# Altium PCB PCB_relay.PcbDoc
Units mil, origin at the board's own origin, x right, y up, seen from the top; angles counter-clockwise.
Board outline 2710 x 1665 mil, 2 copper layers (Top Layer, Bottom Layer); 18 components, 21 nets, 53 pads, 0 vias.
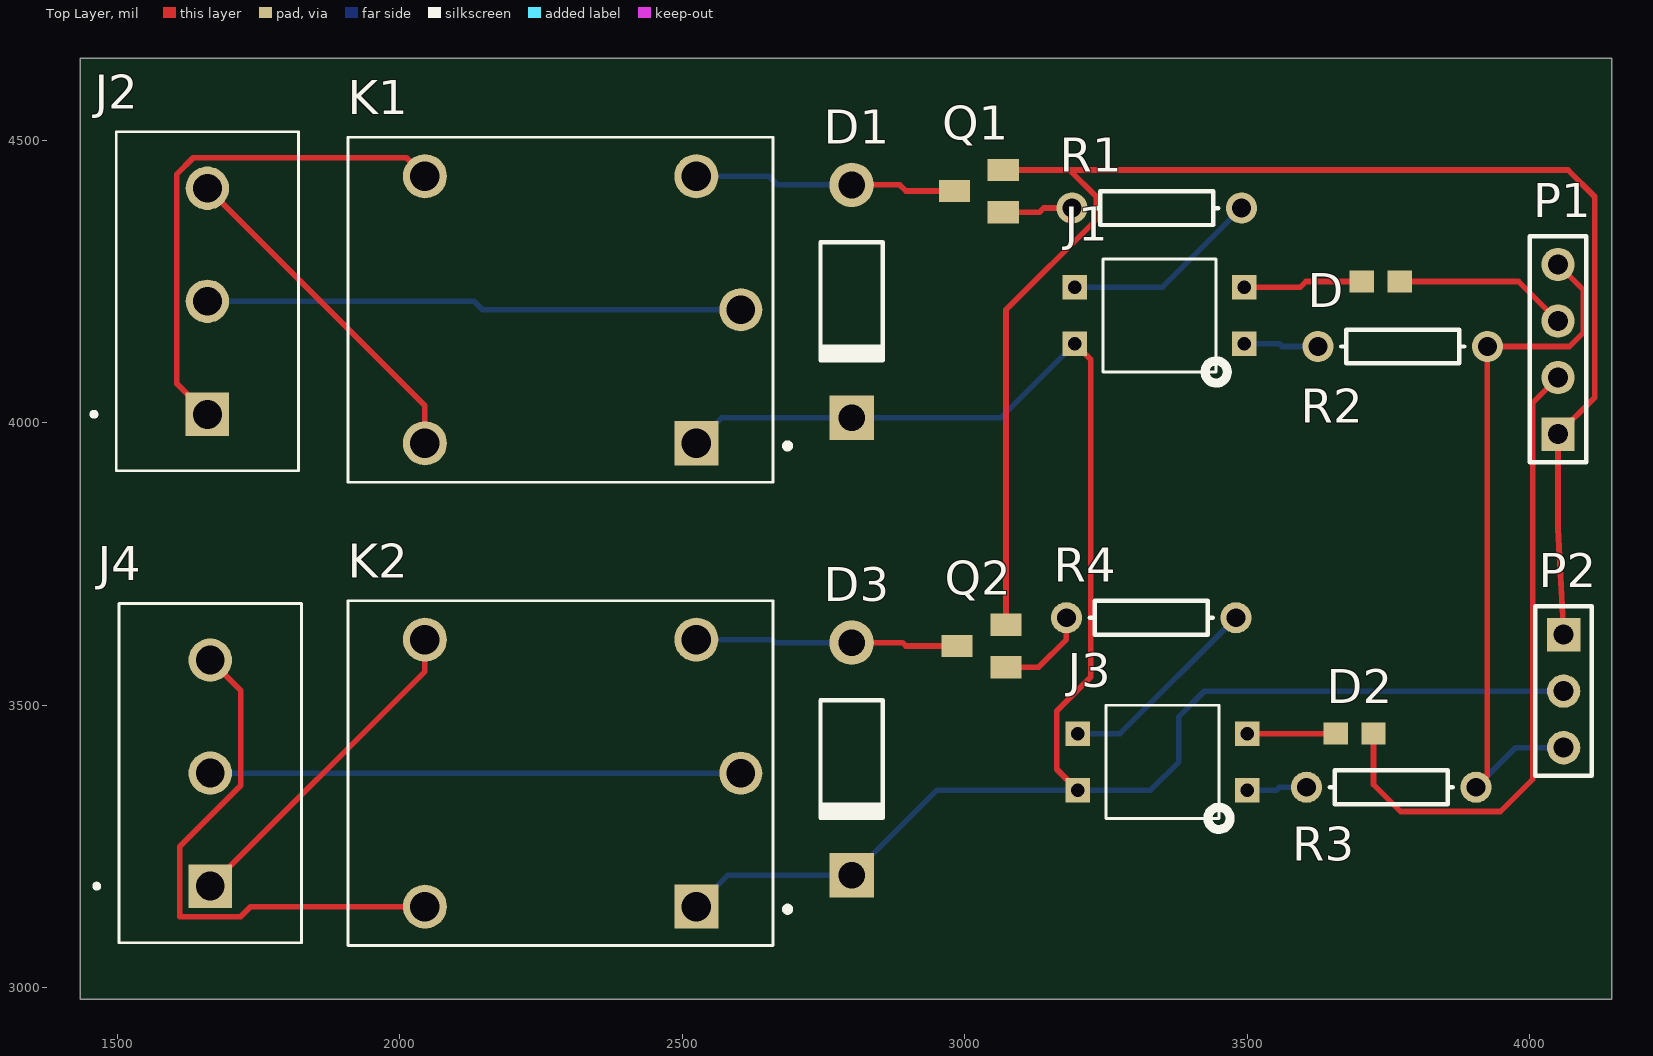
[diagram p0: Top Layer view]
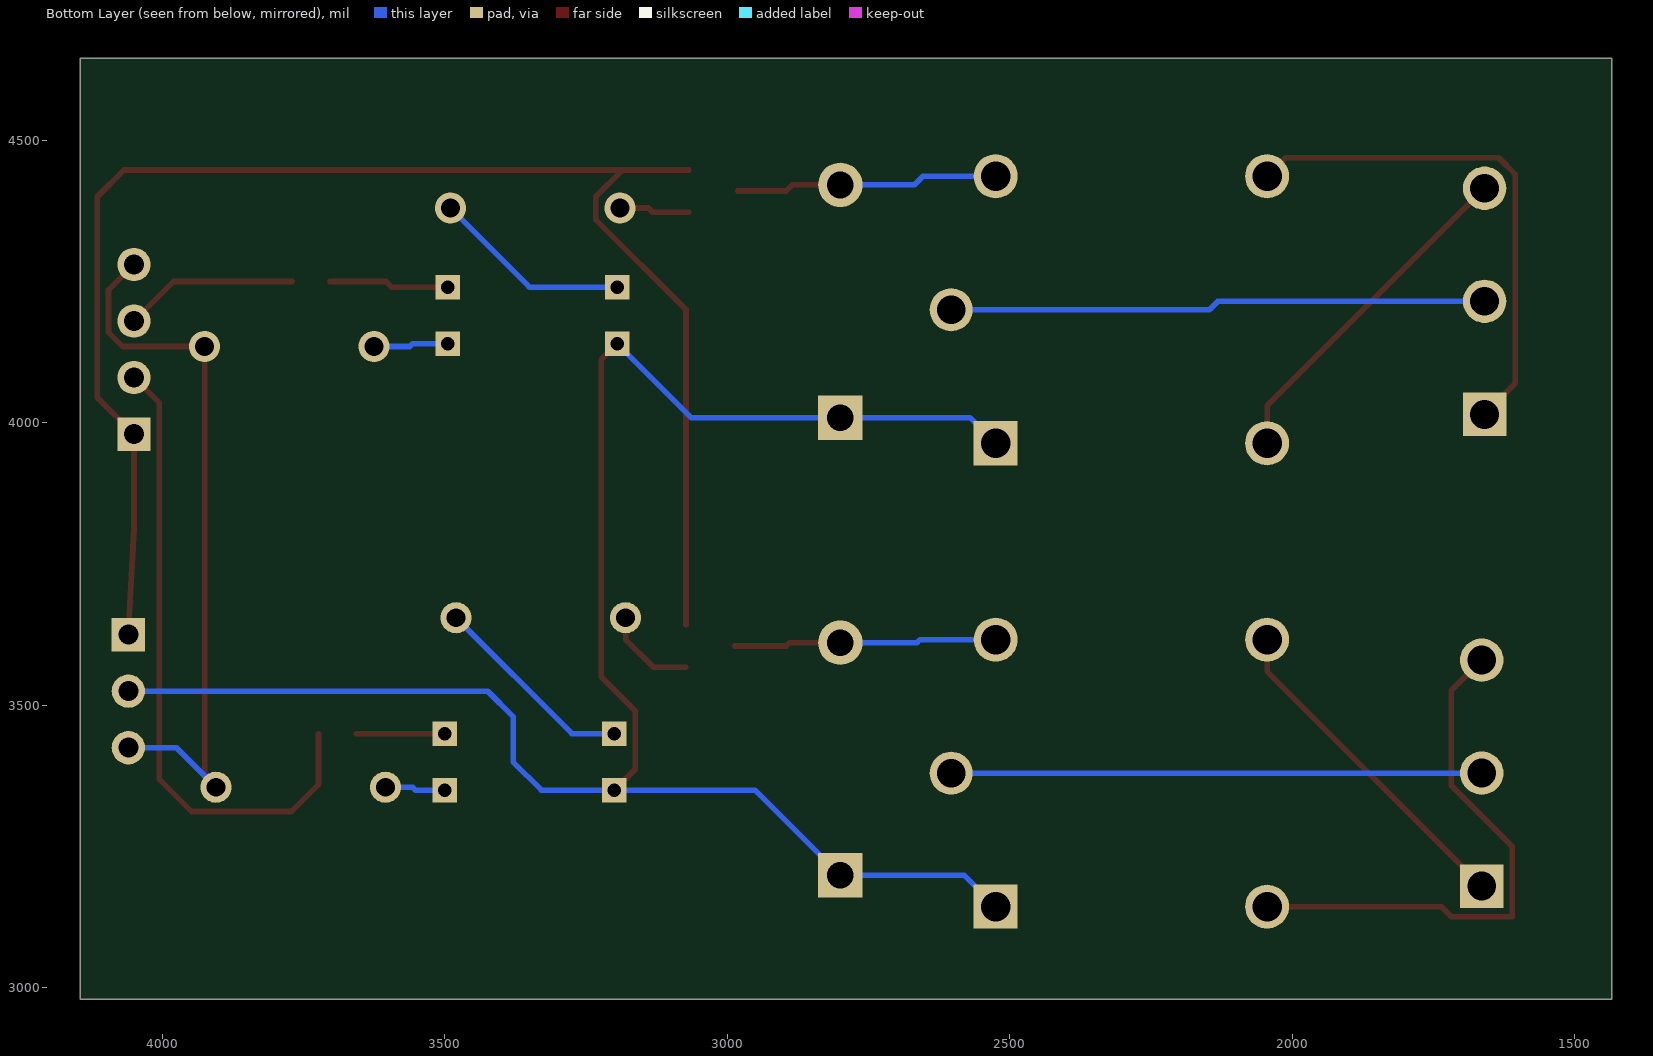
[diagram p1: Bottom Layer view, seen from below]
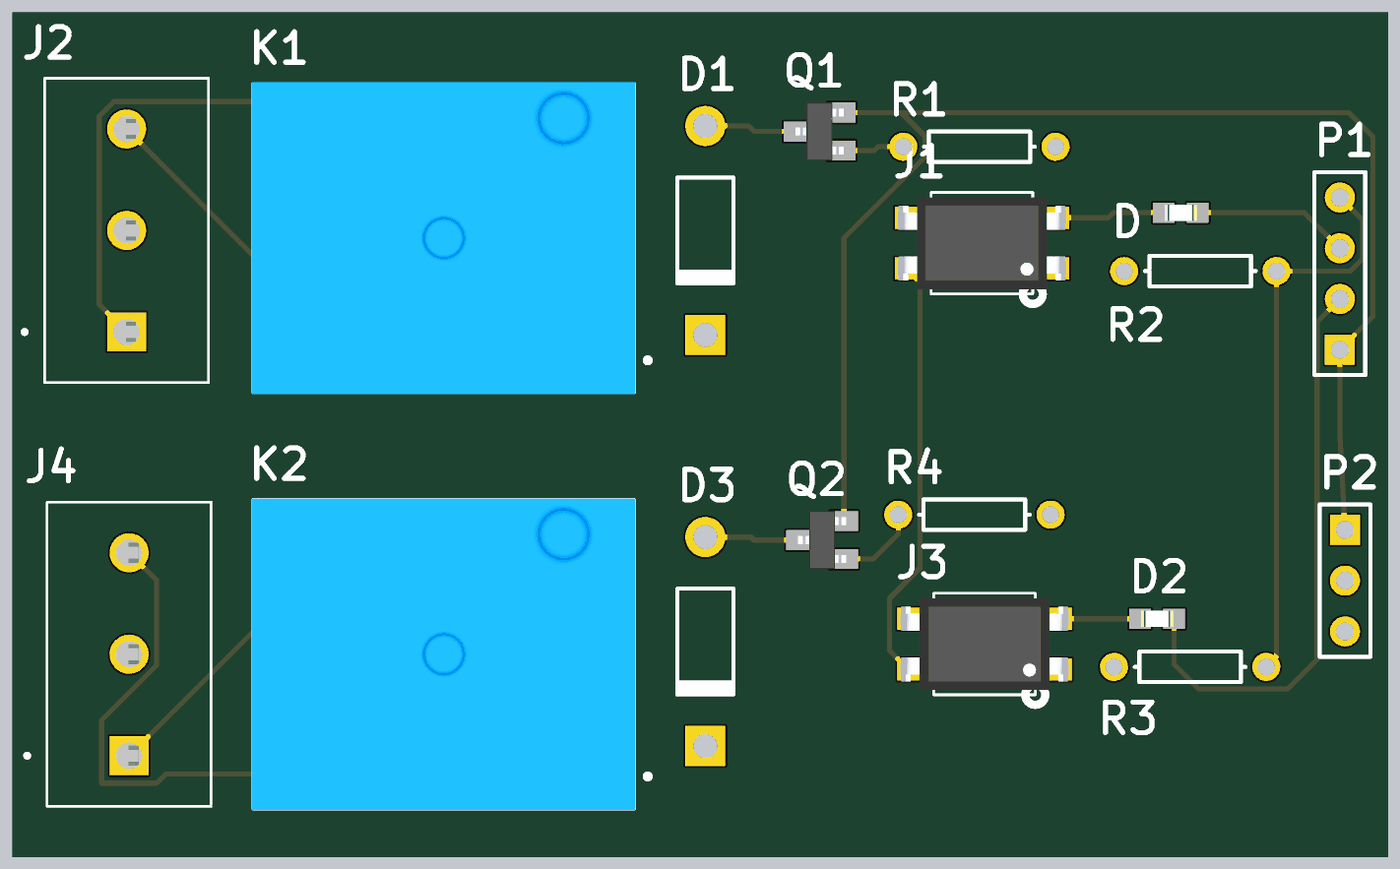
[diagram p2: 3D render of the assembled board from above, using the file's embedded part models]

## Layer stack, top to bottom
Top Solder: solder mask 0.4, Solder Resist, Dk 3.5
Top Layer: signal copper 1.4
Dielectric 1: dielectric 12.6, FR-4, Dk 4.8
Bottom Layer: signal copper 1.4
Bottom Solder: solder mask 0.4, Solder Resist, Dk 3.5

## Board outline
1435,2980 4145,2980 4145,4645 1435,4645

## Design rules (kind name [scope] priority, off if disabled: settings)
Clearance [All] p1: gap=10 ignorepadtopadclearanceinfootprint=FALSE
PolygonConnect [All] p1: connectstyle=Relief reliefconductorwidth=10 reliefentries=4 polygonreliefangle="90 Angle" airgapwidth=10
RoutingVias [All] p1: holewidth=28 width=50 viastyle="Through Hole" minholewidth=28 minwidth=50 maxholewidth=28 maxwidth=50
SolderMaskExpansion [All] p1: expansion=4 istentingtop=FALSE
SupplyNets "Schematic Supply Nets" [InNet('GND')] p1: voltage=0.000
Width [All] p1: maxlimit=10 minlimit=10 preferedwidth=10
30 further rules are at their usual default settings.

## Components (designator, comment, footprint, x,y, rotation, side; value= is the part's Value field where it differs from the comment)
D "LTST-C193TBKT-5A" 0603 3736.54,4250 r180 top
D1 "Diode 1N4004" DO-41 2800,4215 r270 top
D2 "LTST-C193TBKT-5A" 0603 3690,3450 r180 top
D3 "Diode 1N4004" DO-41 2800,3405 r270 top
J1 "LTV-817" LTV-817 3345,4190 r180 top
J2 "TB006_-508-03BE" "CUI_TB006 -508-03BE" 1660,4015 r90 top
J3 "LTV-817" LTV-817 3350,3400 r180 top
J4 "TB006_-508-03BE" "CUI_TB006 -508-03BE" 1665,3180 r90 top
K1 "SRD-05VDC-SL-C" RELAY_SRD-05VDC-SL-C 2285,4200 r180 top
K2 "SRD-05VDC-SL-C" RELAY_SRD-05VDC-SL-C 2285,3380 r180 top
P1 "Header 4" HDR1X4 4050,3980 r90 top
P2 "Header 3" HDR1X3 4060,3625 r270 top
Q1 "BCW31*" SOT23-BEC 3025,4410 r90 top
Q2 "BCW31*" SOT23-BEC 3030,3605 r90 top
R1 "Res1" AXIAL-0.3 3340,4380 r180 top value=1K
R2 "Res1" AXIAL-0.3 3775,4135 r0 top value=1K
R3 "Res1" AXIAL-0.3 3755,3355 r0 top value=1K
R4 "Res1" AXIAL-0.3 3330,3655 r180 top value=1K

## Footprints (in the part's own frame and the unit in brackets; to place one, negate y for a bottom-side part, rotate by r counter-clockwise, add the part's x,y. Pads: shape width x height; smd on the part's side, far side on the other; paste and mask are expansions set on the pad)
0603 [mm]
  rect 1.1x1 smd: 1(-0.85,0) 2(0.85,0)
  body extent -0.8,-0.4 0.8,0.4, height 0.35
AXIAL-0.3 [mm] "Axial Device, Thru-Hole; 2 Leads; 0.3 in Pin Spacing"
  round 1.4 hole 0.85: 1(-3.81,0) 2(3.81,0)
  silkscreen extent -2.77,-0.76 2.77,0.76
"CUI_TB006 -508-03BE" [mm]
  rect 1.95x1.95 / inner round 1.95 / far side rect 1.95x1.95 hole 1.3: 1(0,0)
  round 1.95 hole 1.3: 2(5.08,0) 3(10.16,0)
  silkscreen extent -2.54,-4.1 12.7,5.2, body extent -3.04,-4.32 12.7,3.88, height 2.53
DO-41 [mm] "Diode, Axial; Body 5.2 x 2.7 mm (LxDia. max), Lead Dia. 0.86 mm (max)"
  round 2 hole 1.2: 1(-5.23,0)
  rect 2x2 hole 1.2: 2(5.23,0)
  silkscreen extent -2.65,-1.4 2.75,1.4
HDR1X3 [mm] "Connector; Header; 3 Position"
  rect 1.5x1.5 hole 0.9: 1(0,0)
  round 1.5 hole 0.9: 2(2.54,0) 3(5.08,0)
  silkscreen extent -1.27,-1.27 6.35,1.27
HDR1X4 [mm] "Connector; Header; 4 Position"
  rect 1.5x1.5 hole 0.9: 1(0,0)
  round 1.5 hole 0.9: 2(2.54,0) 3(5.08,0) 4(7.62,0)
  silkscreen extent -1.27,-1.27 8.89,1.27
LTV-817 [mm]
  rect 1.108x1.108 hole 0.6: 1(-3.81,1.27) 2(-3.81,-1.27) 3(3.81,-1.27) 4(3.81,1.27)
  silkscreen extent -3.04,-2.54 2.54,3.04, body extent -4.53,-2.3 4.53,2.3, height 5
RELAY_SRD-05VDC-SL-C [mm]
  rect 1.98x1.98 / inner round 1.98 / far side rect 1.98x1.98 hole 1.32: A1(-6.1,6)
  round 1.98 hole 1.32: A2(-6.1,-6) NC(6.1,6) NO(6.1,-6)
  round 1.935 hole 1.29: COM(-8.1,0)
  silkscreen extent -10.3,-7.75 9.55,7.75, body extent -9.6,-7.8 9.6,7.8, height 15.8
SOT23-BEC [mm]
  rect 1x1.4 smd: B(-0.95,-1.1) C(0,1.1) E(0.95,-1.1)
  body extent -1.45,-1.2 1.45,1.2, height 1.14

## Part data
D D2: "Blue 470nm LED Indication - Discrete 2.8V 0603 _1608 Metric_", Package="0603 Lite-On", Digi-Key_Part_Number=160-1827-1-ND, Digi-Key_Purchase_URL=https://www.digikey.com/product-detail/en/lite-on-inc/LTST-C193TBKT-5A/160-1827-1-ND/2355044?utm_source=snapeda&utm_medium=aggregator&utm_campaign=symbol, MF="Lite-On Inc.", MP=LTST-C193TBKT-5A, SnapEDA_Link=https://www.snapeda.com/parts/LTST-C193TBKT-5A/Lite-On%20Inc./view-part/350303/?ref=snap
D1 D3: "1 Amp General Purpose Rectifier", Code_JEDEC=DO-204-AL, ComponentLink1Description="Manufacturer Link", ComponentLink1URL=http://www.fairchildsemi.com/, ComponentLink2Description=Datasheet, ComponentLink2URL=http://www.fairchildsemi.com/ds/1N%2F1N4001.pdf, DatasheetVersion=1998, LatestRevisionDate=17-Jul-2002, LatestRevisionNote="Re-released for DXP Platform.", PackageDescription="Diode, Axial; Body 5.2 x 2.7 mm (LxDia. max), Lead Dia. 0.86 mm (max)", PackageReference=DO-41, PackageVersion=Aug-1999, Published=8-Jun-2000, Publisher="Altium Limited"
J1 J3: "Optoisolator Transistor Output 5000Vrms 1 Channel 4-DIP", Package="DIP-4 Lite-On", Availability="In Stock", Check_prices=https://www.snapeda.com/parts/LTV-817/Lite-On%20Inc./view-part/92982/?ref=eda, MF="Lite-On Inc.", MP=LTV-817, Price=None, Purchase-URL=https://pricing.snapeda.com/search/part/LTV-817/?ref=eda, SnapEDA_Link=https://www.snapeda.com/parts/LTV-817/Lite-On%20Inc./view-part/92982/?ref=snap
J2 J4: "2~24 Poles, Screw Type, Horizontal, 5.08 Pitch, 26~14 (AWG), Terminal Block Connector", Package=None, Availability="In Stock", Check_prices=https://www.snapeda.com/parts/TB006%20-508-03BE/CUI+Devices/view-part/?ref=eda, CUI_purchase_URL=https://www.cuidevices.com/product/interconnect/connectors/terminal-blocks/tb006-508-series?utm_source=snapeda.com&utm_medium=referral&utm_campaign=snapedaBOM, MF="CUI Devices", MP="TB006 -508-03BE", Price=None, Purchase-URL="https://pricing.snapeda.com/search/part/TB006 -508-03BE/?ref=eda", SnapEDA_Link=https://www.snapeda.com/parts/TB006%20-508-03BE/CUI+Devices/view-part/?ref=snap
K1 K2: "5V Trigger Relay Module For Arduino And Raspberry Pi 5V Trigger Relay Module For Arduino And Raspberry Pi", Package="NON STANDARD-5 Songle Relay", Availability="Not in stock", Check_prices=https://www.snapeda.com/parts/SRD-05VDC-SL-C/Songle+Relay/view-part/?ref=eda, MF="Songle Relay", MP=SRD-05VDC-SL-C, Price=None, SnapEDA_Link=https://www.snapeda.com/parts/SRD-05VDC-SL-C/Songle+Relay/view-part/?ref=snap
P1: "Header, 4-Pin", LatestRevisionDate=17-Jul-2002, LatestRevisionNote="Re-released for DXP Platform.", Publisher="Altium Limited"
P2: "Header, 3-Pin", LatestRevisionDate=17-Jul-2002, LatestRevisionNote="Re-released for DXP Platform.", Publisher="Altium Limited"
Q1 Q2: "â€¢ This device is designed for general purpose amplifier applications at collector currents to 300 mA. â€¢ Sourced from process 10.", Package="SOT-23 Diodes Inc.", Check_prices=https://www.snapeda.com/parts/BCW31/Fairchild+Imaging/view-part/?ref=eda, MF="Fairchild Semiconductor", MP=BCW31, SnapEDA_Link=https://www.snapeda.com/parts/BCW31/Fairchild+Imaging/view-part/?ref=snap
R1 R2 R3 R4: "Resistor", LatestRevisionDate=17-Jul-2002, LatestRevisionNote="Re-released for DXP Platform.", PackageDescription="Axial Device, Thru-Hole; 2 Leads; 0.3 in Pin Spacing", PackageReference=AXIAL-0.3, Published=8-Jun-2000, Publisher="Altium Limited"

## Nets (pads, with @x,y where several pads share a name; then routed paths per layer and width w, separated by ;. In a path a pad name is that pad's centre, name@x,y a point inside that pad or via, vN(x,y) a via of type N, cw(c..) or ccw(c..) an arc to the next point about the centre after c; other vN are vias at no path point)
GND: P1.1 P2.1 Q1.E Q2.E | length 2759.7
  Top Layer w10: Q1.E 3185.6,4447.4 ; Q2.E 3073,3642.4 3073,4200 3233,4360 3233,4400 3185.6,4447.4 ; P2.1 4050,3813 P1.1 4115,4045 4115,4400 4067.6,4447.4 3185.6,4447.4
IN1: D.1 P1.3 | length 309
  Top Layer w10: D.1 3980,4250 P1.3
IN2: D2.1 P1.2 | length 1144.7
  Top Layer w10: D2.1 3723.46,3360 3771.46,3312 3948,3312 4005,3369 4005,4035 P1.2
NetD1_1: D1.1 K1.A2 Q1.C | length 467.4
  Top Layer w10: D1.1 2885,4420.91 2895.91,4410 Q1.C
  Bottom Layer w10: K1.A2 2654,4436.22 2669.31,4420.91 D1.1
NetD2_2: D2.2 J3.2 | length 156.5
  Top Layer w10: J3.2 D2.2
NetD3_1: D3.1 K2.A2 Q2.C | length 466.2
  Top Layer w10: D3.1 2890,3610.91 2895.91,3605 Q2.C
  Bottom Layer w10: K2.A2 2659,3616.22 2664.31,3610.91 D3.1
NetD_2: D.2 J1.2 | length 212.2
  Top Layer w10: J1.2 3594,4240 3604,4250 D.2
NetJ1_1: J1.1 R2.1 | length 132.1
  Bottom Layer w10: J1.1 3557,4140 3562,4135 R2.1
NetJ1_3: J1.3 R1.1 | length 353
  Bottom Layer w10: J1.3 3350,4240 R1.1
NetJ2_1: J2.1 K1.NO | length 911.8
  Top Layer w10: J2.1 1606,4069 1606,4440 1635,4469 2012.06,4469 K1.NO
NetJ2_2: J2.2 K1.COM | length 950.1
  Bottom Layer w10: J2.2 2132,4215 2147,4200 K1.COM
NetJ2_3: J2.3 K1.NC | length 610.6
  Top Layer w10: J2.3 2044.84,4030.16 K1.NC
NetJ3_1: J3.1 R3.1 | length 107.1
  Bottom Layer w10: J3.1 3551.81,3350 3556.81,3355 R3.1
NetJ3_3: J3.3 R4.1 | length 364.9
  Bottom Layer w10: J3.3 3275,3450 R4.1
NetJ4_1: J4.1 K2.NO | length 593.6
  Top Layer w10: J4.1 2044.84,3559.84 K2.NO
NetJ4_2: J4.2 K2.COM | length 938.9
  Bottom Layer w10: J4.2 K2.COM
NetJ4_3: J4.3 K2.NC | length 962.3
  Top Layer w10: J4.3 1719,3526 1719,3358 1611,3250 1611,3126 1719,3126 1736.78,3143.78 K2.NC
NetQ1_B: Q1.B R1.2 | length 124.8
  Top Layer w10: Q1.B 3132.4,4372.6 3139.8,4380 R1.2
NetQ2_B: Q2.B R4.2 | length 165.4
  Top Layer w10: Q2.B 3131,3567.6 3180,3616.6 R4.2
"RY VCC": D1.2 D3.2 J1.4 J3.4 K1.A1 K2.A1 P2.2 | length 3324.2
  Top Layer w10: J1.4 3223,4112 3223,3550 3163,3490 3163,3387 J3.4
  Bottom Layer w10: K2.A1 2580.47,3199.09 D3.2 2950.91,3350 J3.4 3329,3350 3379,3400 3379,3480 3424,3525 P2.2 ; K1.A1 2570.47,4009.09 D1.2 3064.09,4009.09 J1.4
VCC: P1.4 P2.3 R2.2 R3.2 | length 1291.3
  Top Layer w10: R3.2 3925,3375 R2.2 4070,4135 4095,4160 4095,4235 P1.4
  Bottom Layer w10: R3.2 3975,3425 P2.3